# EAGLE board DC30_Cnet_Cow-A-Bunga_SAO_Panel (EAGLE 9.6.2)
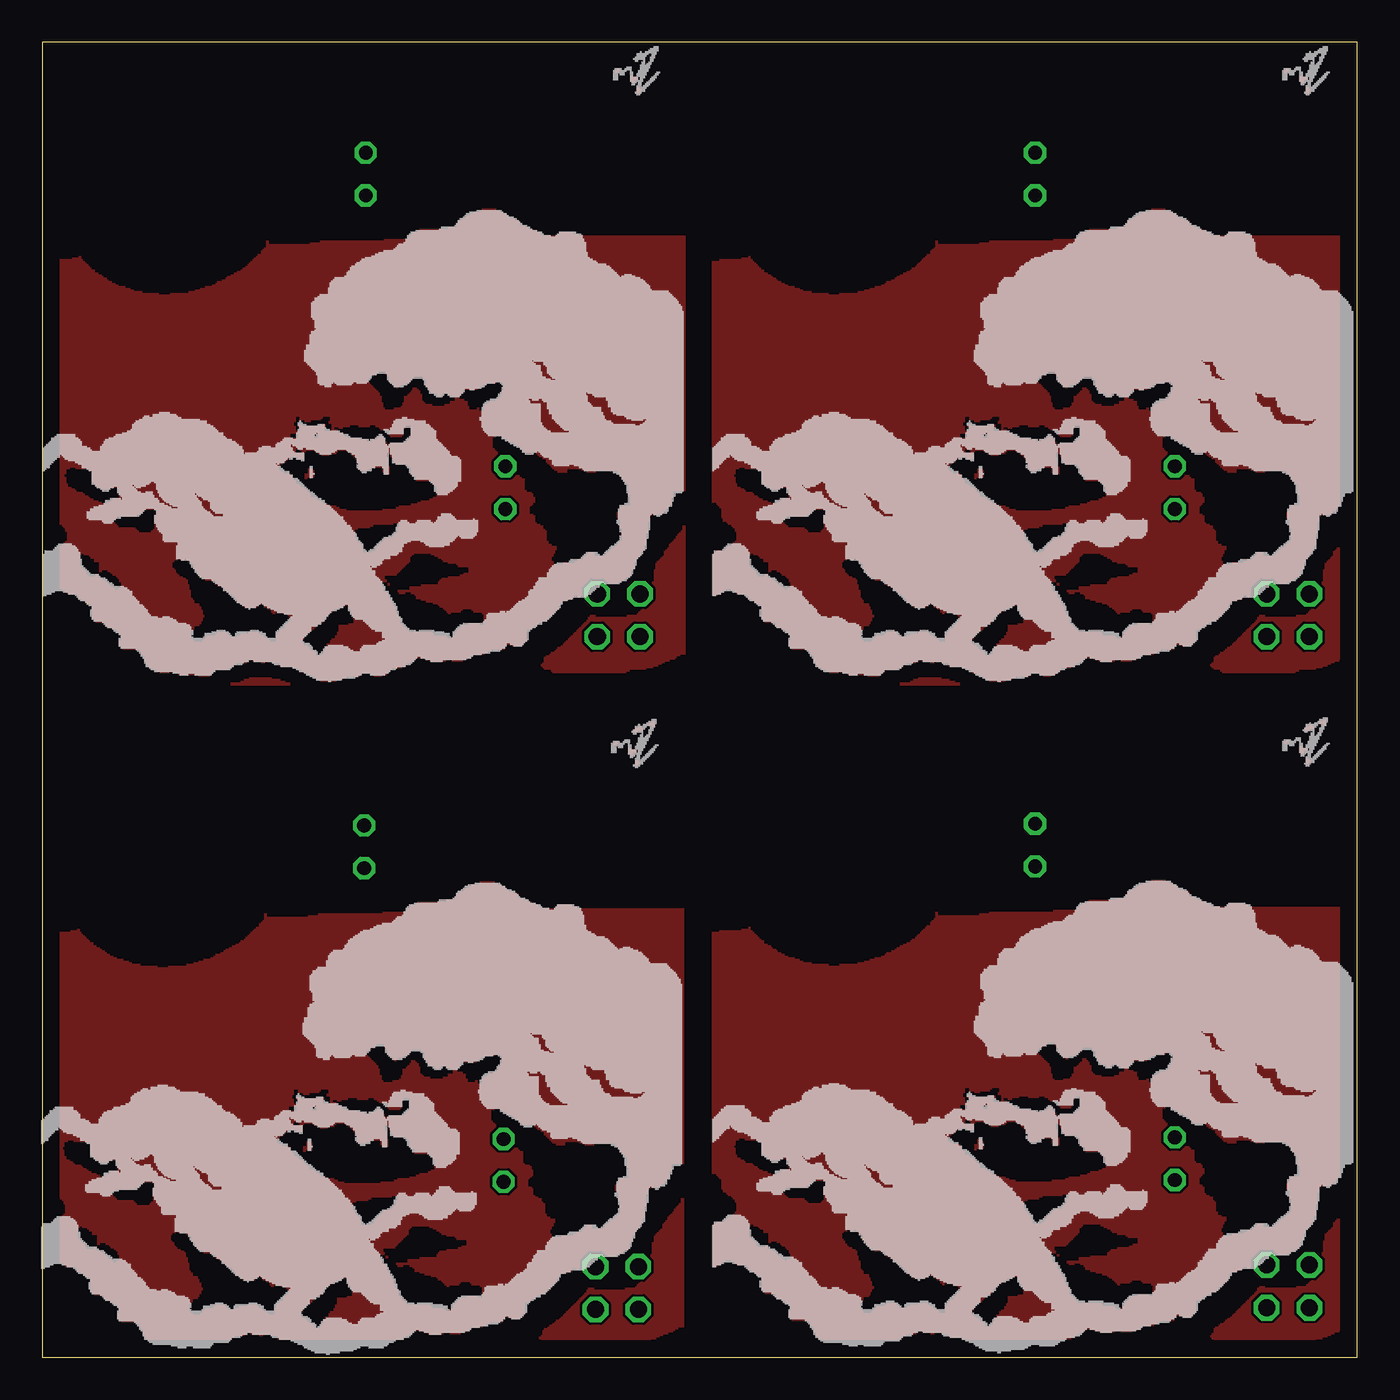
[diagram p0: board, top side]
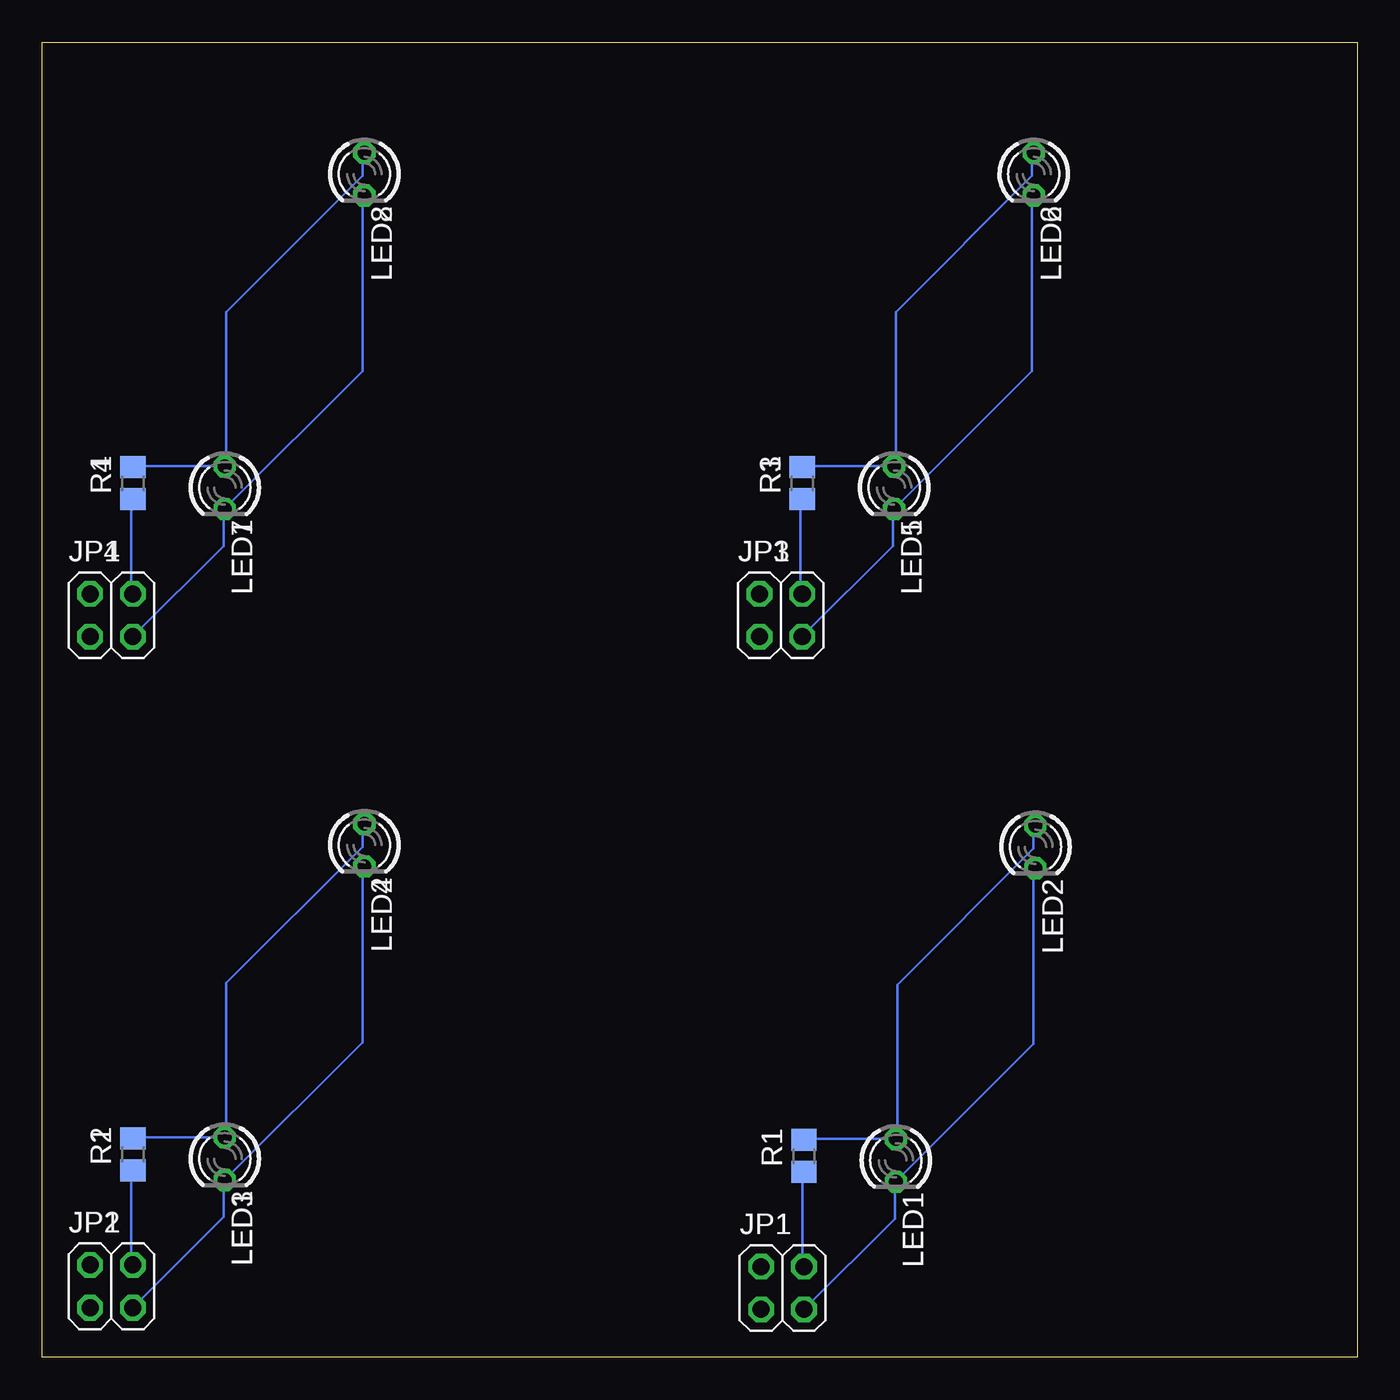
[diagram p1: board, bottom side, seen from below]

Size 78 x 78 mm. Coordinates in mm from the lower left corner, seen from the top.
Outline: 0,0 78,0 78,78 0,78 0,0
Copper layers (1*16): Top 0.035mm / dielectric 1.5mm / Bottom 0.035mm
Design rules "default": minimum track width 6mil, minimum drill 0.35mm, track to track 6mil, track to pad 6mil, pad to pad 6mil, via to via 6mil, smd to smd 6mil, copper to edge 40mil, drill to drill 6mil, minimum pad ring 10mil, minimum via ring 8mil, stop-mask expansion 4mil, vias tented up to drill 0mil, thermal gap 10mil
tRestrict: area 16.5,10.8 to 17.2,10.9; area 16.4,10.8 to 17.6,10.9; area 16.2,10.9 to 18.6,11.1; area 16.1,11.1 to 19.4,11.2; area 15.9,11.1 to 19.9,11.2; area 15.9,11.2 to 17.4,11.4; area 17.6,11.2 to 20.1,11.4; area 15.8,11.3 to 17.2,11.4; area 17.6,11.3 to 20.2,11.4; area 15.6,11.4 to 17.2,11.6; area 17.8,11.4 to 20.6,11.6; area 15.6,11.6 to 17.1,11.7; 5028 more areas
bRestrict: area 16.5,10.8 to 17.2,10.9; area 16.4,10.8 to 17.6,10.9; area 16.2,10.9 to 18.6,11.1; area 16.1,11.1 to 19.4,11.2; area 15.9,11.1 to 19.9,11.2; area 15.9,11.2 to 17.4,11.4; area 17.6,11.2 to 20.1,11.4; area 15.8,11.3 to 17.2,11.4; area 17.6,11.3 to 20.2,11.4; area 15.6,11.4 to 17.2,11.6; area 17.8,11.4 to 20.6,11.6; area 15.6,11.6 to 17.1,11.7; 796 more areas

## Footprints (pad centres in the part's own frame; a part is rotated, then mirrored left to right if it is on the bottom)
2X02 = drill 1.016 octagon: 1 -1.27,-1.27; 2 -1.27,1.27; 3 1.27,-1.27; 4 1.27,1.27
LED3MM = drill 0.813 octagon: A -1.27,0; K 1.27,0
R0805 = smd 1.3 x 1.5: 1 -0.95,0; 2 0.95,0

## Placement (x,y rotation side)
JP1  [2X02]  34.09,4.11 0 bottom
JP2  [2X02]  73.89,4.21 0 bottom
JP3  [2X02]  34.19,44.01 0 bottom
JP4  [2X02]  73.89,44.01 0 bottom
LED1  [LED3MM]  27.37,11.68 270 bottom
LED2  [LED3MM]  19.09,30.28 270 bottom
LED3  [LED3MM]  67.17,11.78 270 bottom
LED4  [LED3MM]  58.89,30.38 270 bottom
LED5  [LED3MM]  27.47,51.58 270 bottom
LED6  [LED3MM]  19.19,70.18 270 bottom
LED7  [LED3MM]  67.17,51.58 270 bottom
LED8  [LED3MM]  58.89,70.18 270 bottom
R1  [R0805]  32.82,11.94 90 bottom
R2  [R0805]  72.62,12.04 90 bottom
R3  [R0805]  32.92,51.84 90 bottom
R4  [R0805]  72.62,51.84 90 bottom

## Library data of the parts
JP1-JP4 = pinhead
LED1-LED8 = led
R1-R4 = rcl; SPICEPREFIX: R

## Nets
N$1: JP1.3 LED1.K LED2.K
N$2: JP1.4 R1.1
N$3: JP2.3 LED3.K LED4.K
N$4: LED1.A LED2.A R1.2
N$5: LED3.A LED4.A R2.2
N$6: JP2.4 R2.1
N$7: JP3.3 LED5.K LED6.K
N$8: LED5.A LED6.A R3.2
N$9: JP3.4 R3.1
N$10: JP4.3 LED7.K LED8.K
N$11: LED7.A LED8.A R4.2
N$12: JP4.4 R4.1

## Tracks (layer width: path | path; a pad name or v marks a point on that pad's centre or on a via)
GND
  pour Top: 0,0 0,38 38,38 38,0
GND1
  pour Top: 39.8,0.1 39.8,38.1 77.8,38.1 77.8,0.1
GND2
  pour Top: 0.1,39.9 0.1,77.9 38.1,77.9 38.1,39.9
GND3
  pour Top: 39.8,39.9 39.8,77.9 77.8,77.9 77.8,39.9
N$1
  Bottom 0.152: JP1.3 32.77,2.9 27.43,8.23 27.43,10.36 LED1.K 27.28,10.52 19.2,18.59 19.2,28.96 LED2.K
N$2
  Bottom 0.152: R1.1 32.92,10.97 32.92,5.49 JP1.4
N$3
  Bottom 0.152: JP2.3 72.57,3 67.23,8.33 67.23,10.46 LED3.K 67.08,10.62 59,18.69 59,29.06 LED4.K
N$4
  Bottom 0.152: R1.2 32.77,12.95 27.43,12.95 LED1.A 27.28,12.95 27.28,22.1 19.2,30.18 19.2,31.55 LED2.A
N$5
  Bottom 0.152: R2.2 72.57,13.05 67.23,13.05 LED3.A 67.08,13.05 67.08,22.2 59,30.27 59,31.65 LED4.A
N$6
  Bottom 0.152: R2.1 72.72,11.07 72.72,5.59 JP2.4
N$7
  Bottom 0.152: JP3.3 32.87,42.8 27.53,48.13 27.53,50.26 LED5.K 27.38,50.42 19.3,58.49 19.3,68.86 LED6.K
N$8
  Bottom 0.152: R3.2 32.87,52.85 27.53,52.85 LED5.A 27.38,52.85 27.38,62 19.3,70.08 19.3,71.45 LED6.A
N$9
  Bottom 0.152: R3.1 33.02,50.87 33.02,45.39 JP3.4
N$10
  Bottom 0.152: JP4.3 72.57,42.8 67.23,48.13 67.23,50.26 LED7.K 67.08,50.42 59,58.49 59,68.86 LED8.K
N$11
  Bottom 0.152: R4.2 72.57,52.85 67.23,52.85 LED7.A 67.08,52.85 67.08,62 59,70.08 59,71.45 LED8.A
N$12
  Bottom 0.152: R4.1 72.72,50.87 72.72,45.39 JP4.4

## Text on the board
_bNames: LED2 | LED2 | R1 | R1 | LED1 | LED1 | JP1 | JP1 | LED2 | LED2 | R1 | R1 | LED1 | LED1 | JP1 | JP1